# Altium PCB PCB.PcbDoc
Units mil, origin at the board's own origin, x right, y up, seen from the top; angles counter-clockwise.
Board outline 3929 x 1693 mil, 4 copper layers (Top Layer, Layer 1, Layer 2, Bottom Layer), stack 23.756 mil thick; 143 components, 82 nets, 428 pads, 1 vias.
Unrouted connection lines stored in the file: 274.
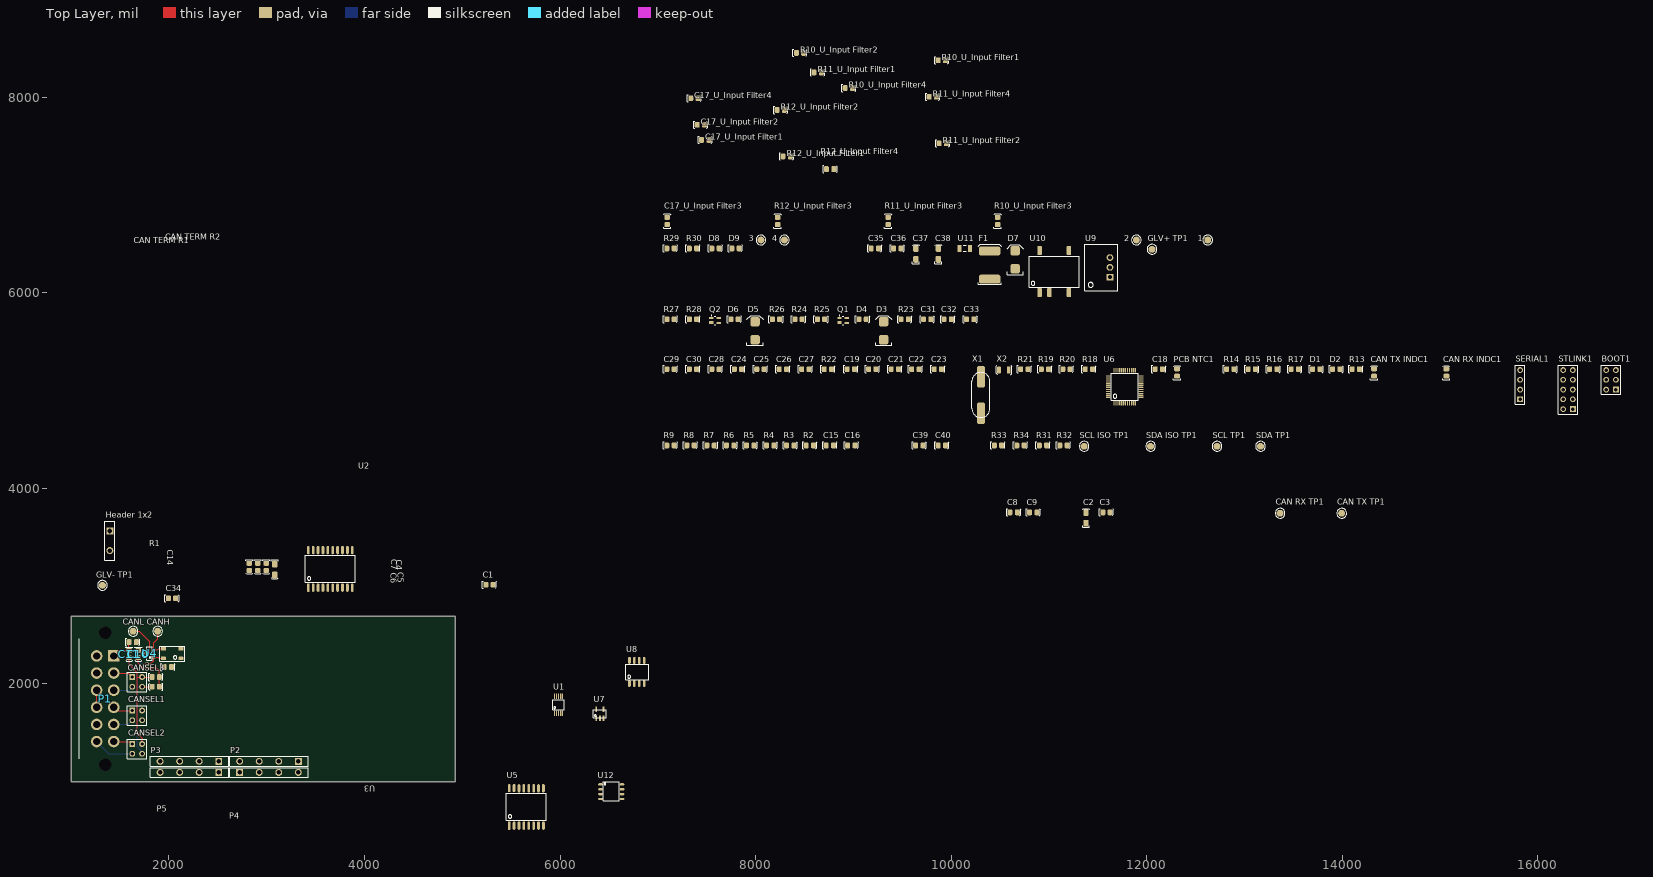
[diagram p0: Top Layer view]
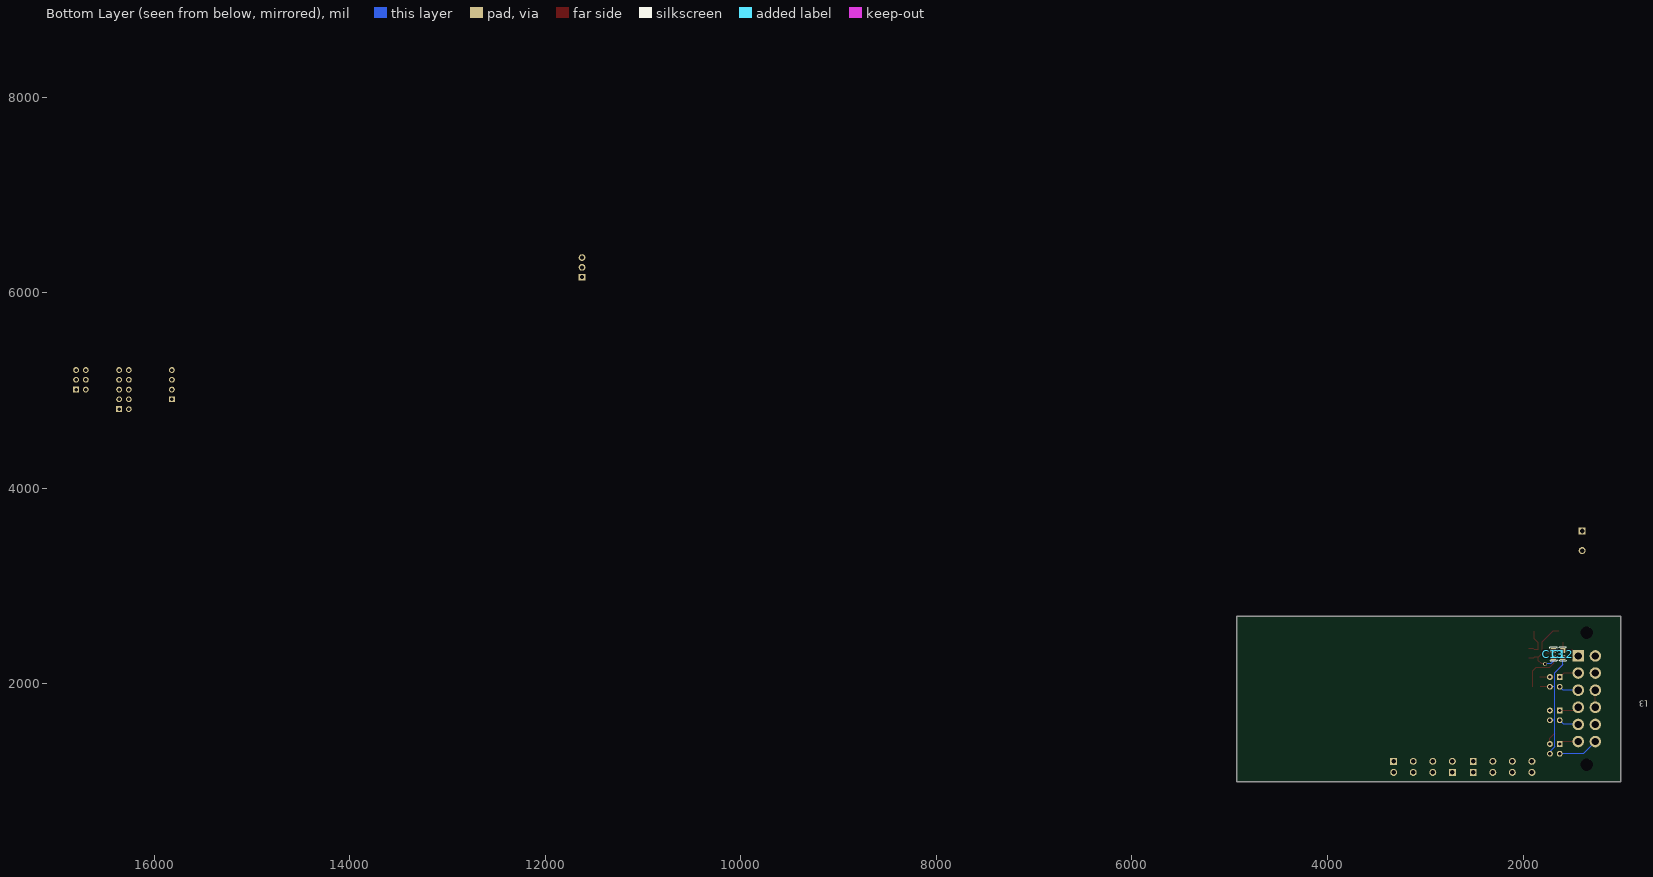
[diagram p1: Bottom Layer view, seen from below]
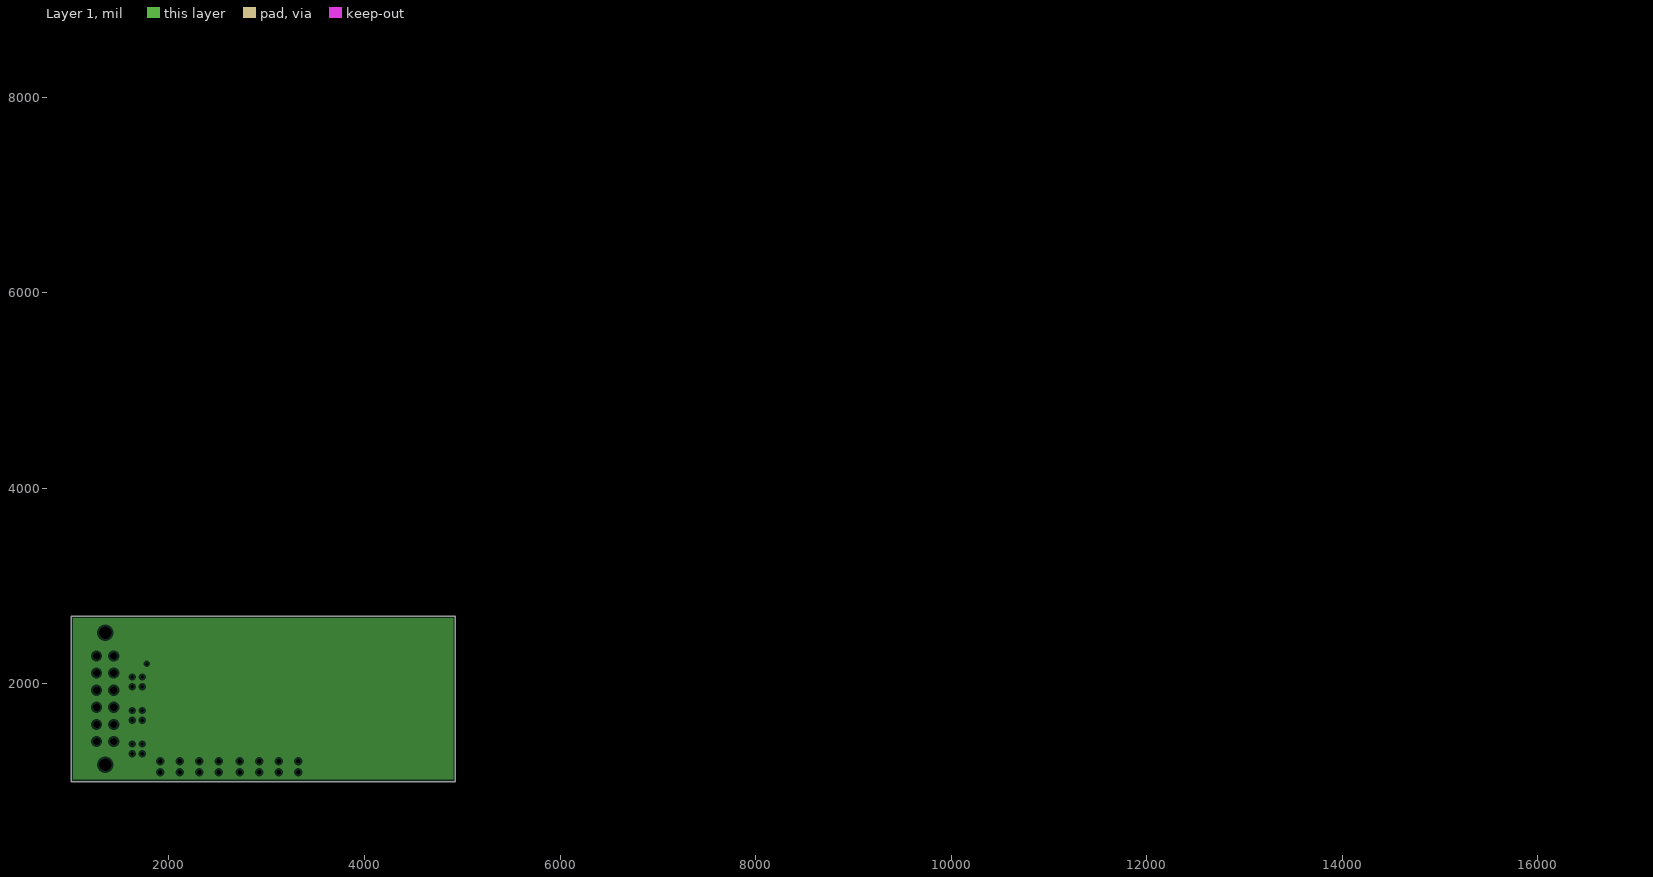
[diagram p2: Layer 1, clearances drawn from the general rule]
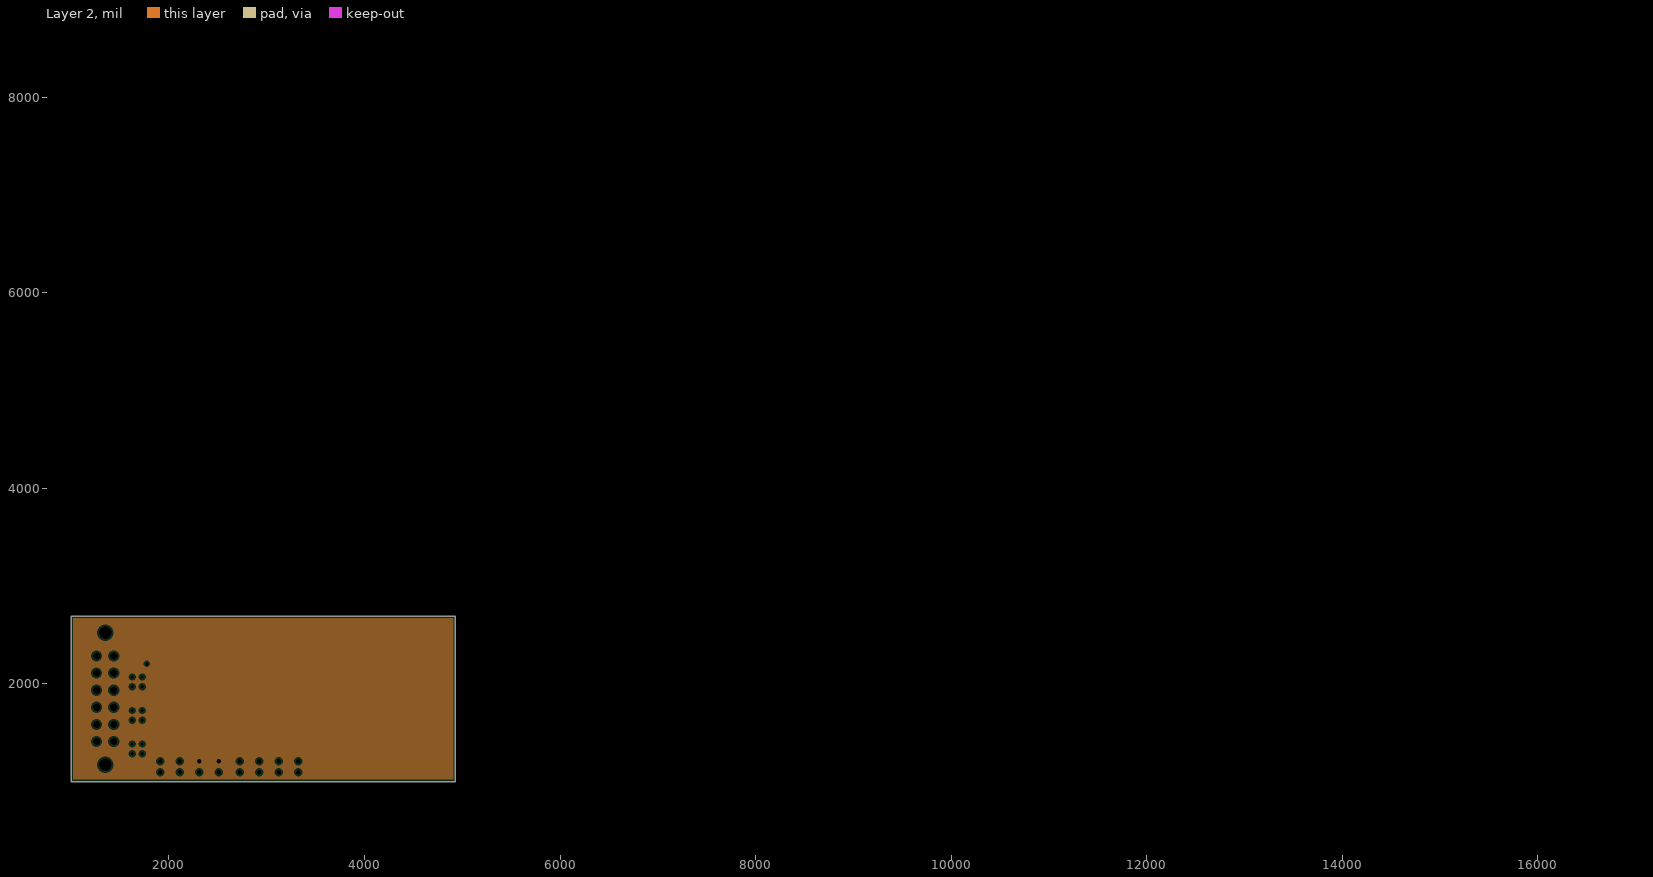
[diagram p3: Layer 2, clearances drawn from the general rule]

## Layer stack, top to bottom
Top Solder: solder mask 0.4, Solder Resist, Dk 3.5
Top Layer: signal copper 1.4
Dielectric 2: prepreg 2.8, PP-006, Dk 4.1
Layer 1: plane copper 1.3779, net 0V
Dielectric 1: dielectric 12.6, FR-4, Dk 4.8
Layer 2: plane copper 1.3779, net 5V
Dielectric 3: prepreg 2.8, PP-006, Dk 4.1
Bottom Layer: signal copper 1.4
Bottom Solder: solder mask 0.4, Solder Resist, Dk 3.5

## Board outline
1000,1000 4929,1000 4929,2693 1000,2693

## Design rules (kind name [scope] priority, off if disabled: settings)
Clearance [All] p1: gap=10 ignorepadtopadclearanceinfootprint=FALSE except(0: Arc-Hole Track-Hole SMDPad-Hole THPad-Hole Via-Hole Fill-Hole Poly-Hole Region-Hole Text-Hole)
PlaneClearance [All] p1: clearance=20
PlaneConnect [All] p1: planeconnectstyle=Relief reliefexpansion=20 reliefentries=4 reliefconductorwidth=10 reliefairgap=10
PolygonConnect [All] p1: connectstyle=Relief reliefconductorwidth=10 reliefentries=4 polygonreliefangle="90 Angle" airgapwidth=10
RoutingVias [All] p1: holewidth=28 width=50 viastyle="Through Hole" minholewidth=28 minwidth=50 maxholewidth=28 maxwidth=50
SolderMaskExpansion [All] p1: expansion=4 istentingtop=FALSE
Width [All] p1: maxlimit=10 minlimit=10 preferedwidth=10
28 further rules are at their usual default settings.

## Classes and differential pairs
channel class "Input Filter": "U_Input Filter1" "U_Input Filter2" "U_Input Filter3" "U_Input Filter4"
component class "U_Power Supply": 1 2 3 4 C34 C35 C36 C37 C38 D7 D8 D9 F1 "GLV+ TP1" "GLV- TP1" R29 R30 U9 U10 U11
component class "U_Output Driver": C31 C32 C33 D3 D4 D5 D6 Q1 Q2 R23 R24 R25 R26 R27 R28 U8
component class U_Microcontroller: BOOT1 C18 C19 C20 C21 C22 C23 C24 C25 C26 C27 C28 C29 C30 "CAN RX INDC1" "CAN TX INDC1" D1 D2 "PCB NTC1" R13 R14 R15 R16 R17 R18 R19 R20 R21 R22 SERIAL1 STLINK1 U6 U7 X1 X2
component class "U_Input Filter4": "C17_U_Input Filter4" "R10_U_Input Filter4" "R11_U_Input Filter4" "R12_U_Input Filter4"
component class "U_Input Filter3": "C17_U_Input Filter3" "R10_U_Input Filter3" "R11_U_Input Filter3" "R12_U_Input Filter3"
component class "U_Input Filter2": "C17_U_Input Filter2" "R10_U_Input Filter2" "R11_U_Input Filter2" "R12_U_Input Filter2"
component class "U_Input Filter1": "C17_U_Input Filter1" "R10_U_Input Filter1" "R11_U_Input Filter1" "R12_U_Input Filter1"
component class "U_Digital Inputs": C15 C16 C39 C40 R2 R3 R4 R5 R6 R7 R8 R9 R31 R32 R33 R34 "SCL ISO TP1" "SCL TP1" "SDA ISO TP1" "SDA TP1" U5 U12
component class U_CAN: C2 C3 C4 C5 C6 C7 C8 C9 C10 C11 C12 C13 C14 "CAN RX TP1" "CAN TERM R1" "CAN TERM R2" "CAN TX TP1" CANH CANL R1 U2 U3 U4
component class "U_4 Channel ADC": C1 U1
component class "Top Level": CANSEL1 CANSEL2 CANSEL3 "Header 1x2" P1 P2 P3 P4 P5

## Components (designator, comment, footprint, x,y, rotation, side; value= is the part's Value field where it differs from the comment)
1 "0mm" "SMD Test Point" 12625,6540 r90 top
2 "0mm" "SMD Test Point" 11895,6540 r90 top
3 "0mm" "SMD Test Point" 8055,6540 r90 top
4 "0mm" "SMD Test Point" 8295,6540 r90 top
BOOT1 "2.54mm" "TH 2.54mm Header 2x3" 16800,5010 r90 top
C1 "100nF" 0805 5279.07,3015.03 r0 top
C2 "10nF" 1206 11380,3745 r90 top
C3 "100nF" 0805 11590,3755 r0 top
C4 "100nF" 0805 2822.03,3195.72 r270 top
C5 "10nF" 1206 3081.03,3122.89 r270 top
C6 "10uF" 0805 2909.03,3195.72 r270 top
C7 "100nF" 0805 2996.03,3195.72 r270 top
C8 "10uF" 0805 10640,3755 r0 top
C9 "100nF" 0805 10840,3755 r0 top
C10 "22pF" 0805 1688,2304 r270 top
C11 "100pF" 0805 1593,2304 r270 top
C12 "100pF" 0805 1592.17,2304 r270 bottom
C13 "100pF" 0805 1688,2303 r270 bottom
C14 "100pF" 0805 1629,2428 r0 top
C15 "100nF" 0805 8760,4440 r0 top
C16 "100nF" 0805 8980,4440 r0 top
"C17_U_Input Filter1" "100nF" 0805 7485,7565 r0 top (schematic designator C17)
"C17_U_Input Filter2" "100nF" 0805 7440,7720 r0 top (schematic designator C17)
"C17_U_Input Filter3" "100nF" 0805 7095,6735 r90 top (schematic designator C17)
"C17_U_Input Filter4" "100nF" 0805 7375,7990 r0 top (schematic designator C17)
C18 "100nF" 0805 12125,5220 r0 top
C19 "22pF" 0805 8975,5220 r0 top
C20 "22pF" 0805 9195,5220 r0 top
C21 "1uF" 0805 9425,5220 r0 top
C22 "100nF" 0805 9635,5220 r0 top
C23 "1uF" 0805 9865,5220 r0 top
C24 "1uF" 0805 7820,5220 r0 top
C25 "100nF" 0805 8050,5220 r0 top
C26 "100nF" 0805 8280,5220 r0 top
C27 "100nF" 0805 8510,5220 r0 top
C28 "22uF" 0805 7590,5220 r0 top
C29 "22pF" 0805 7130,5220 r0 top
C30 "22pF" 0805 7360,5220 r0 top
C31 "100nF" 0805 9755,5730 r0 top
C32 "100nF" 0805 9965,5730 r0 top
C33 "10uF" 0805 10195,5730 r0 top
C34 "10uF" 0805 2032.07,2877.03 r0 top
C35 "10uF" 0805 9220,6455 r0 top
C36 "10uF" 0805 9450,6455 r0 top
C37 "22uF" 1206 9640,6445 r90 top
C38 "22uF" 1206 9870,6445 r90 top
C39 "100nF" 0805 9675,4440 r0 top
C40 "100nF" 0805 9905,4440 r0 top
"CAN RX INDC1" "Blue" "0805 LED" 15065,5185 r90 top
"CAN RX TP1" "0mm" "SMD Test Point" 13365,3745 r90 top
"CAN TERM R1" "56R" 0805 1864.03,1970.07 r180 top
"CAN TERM R2" "56R" 0805 1864.83,2071 r0 top
"CAN TX INDC1" "Blue" "0805 LED" 14325,5185 r90 top
"CAN TX TP1" "0mm" "SMD Test Point" 13995,3745 r90 top
CANH "0mm" "SMD Test Point" 1884,2538 r90 top (schematic designator "CANH TP1")
CANL "0mm" "SMD Test Point" 1633,2538 r90 top (schematic designator "CANL TP1")
CANSEL1 "2.54mm" "TH 2.54mm Header 2x2" 1625,1727.5 r270 top
CANSEL2 "2.54mm" "TH 2.54mm Header 2x2" 1625,1385 r270 top
CANSEL3 "2.54mm" "TH 2.54mm Header 2x2" 1625,2070 r270 top
D1 "Red" "0805 LED" 13735,5220 r0 top
D2 "Red" "0805 LED" 13940,5220 r0 top
D3 "SD560BTR" "SMB Diode" 9310,5530 r90 top
D4 "Orange" "0805 LED" 9095,5730 r0 top
D5 "SD560BTR" "SMB Diode" 7995,5530 r90 top
D6 "Orange" "0805 LED" 7785,5730 r0 top
D7 "SD560BTR" "SMB Diode" 10655,6255 r90 top
D8 "Red" "0805 LED" 7590,6455 r0 top
D9 "Red" "0805 LED" 7795,6455 r0 top
F1 "0ZCF0100AF2A" 2920 10395,6140 r90 top
"GLV+ TP1" "0mm" "SMD Test Point" 12055,6445 r90 top
"GLV- TP1" "0mm" "SMD Test Point" 1319.5,3008 r90 top
"Header 1x2" "2.54mm" "TH 5.08mm Header 1x2" 1395,3563 r270 top
P1 "DTF13-12P" DTF13-12P 1260,1848.23 r270 top
P2 "2.54mm" "TH 5.08mm Header 1x4" 3323,1208 r180 top
P3 "2.54mm" "TH 5.08mm Header 1x4" 2509,1208 r180 top
P4 "2.54mm" "TH 5.08mm Header 1x4" 2723,1094 r0 top
P5 "2.54mm" "TH 5.08mm Header 1x4" 2509,1094 r180 top
"PCB NTC1" "10K (NTC) (B25/85 3430K)" 0805 12310,5185 r90 top
Q1 "STD70N10F4" SOT-343_N 8895,5715 r0 top
Q2 "STD70N10F4" SOT-343_N 7585,5715 r0 top
R1 "0R" 0805 1989,2173 r0 top
R2 "10k" 0805 8555,4440 r0 top
R3 "10k" 0805 8355,4440 r0 top
R4 "10k" 0805 8150,4440 r0 top
R5 "10k" 0805 7945,4440 r0 top
R6 "10k" 0805 7740,4440 r0 top
R7 "10k" 0805 7540,4440 r0 top
R8 "10k" 0805 7335,4440 r0 top
R9 "10k" 0805 7130,4440 r0 top
"R10_U_Input Filter1" "10k" 0805 9905,8380 r0 top (schematic designator R10)
"R10_U_Input Filter2" "10k" 0805 8455,8455 r0 top (schematic designator R10)
"R10_U_Input Filter3" "10k" 0805 10475,6735 r90 top (schematic designator R10)
"R10_U_Input Filter4" "10k" 0805 8955,8095 r0 top (schematic designator R10)
"R11_U_Input Filter1" "1k" 0805 8635,8255 r0 top (schematic designator R11)
"R11_U_Input Filter2" "1k" 0805 9915,7530 r0 top (schematic designator R11)
"R11_U_Input Filter3" "1k" 0805 9355,6735 r90 top (schematic designator R11)
"R11_U_Input Filter4" "1k" 0805 9812.87,8006.03 r0 top (schematic designator R11)
"R12_U_Input Filter1" "10k" 0805 8317.87,7396.03 r0 top (schematic designator R12)
"R12_U_Input Filter2" "10k" 0805 8257.87,7871.03 r0 top (schematic designator R12)
"R12_U_Input Filter3" "10k" 0805 8225,6735 r90 top (schematic designator R12)
"R12_U_Input Filter4" "10k" 0805 8762.87,7266.03 r0 top (schematic designator R12)
R13 "10k" 0805 14140,5220 r0 top
R14 "510R" 0805 12855,5220 r0 top
R15 "510R" 0805 13075,5220 r0 top
R16 "680R" 0805 13295,5220 r0 top
R17 "680R" 0805 13515,5220 r0 top
R18 "10k" 0805 11410,5220 r0 top
R19 "5.1k" 0805 10960,5220 r0 top
R20 "5.1k" 0805 11180,5220 r0 top
R21 "10k" 0805 10750,5220 r0 top
R22 "10M" 0805 8740,5220 r0 top
R23 "1.5k" 0805 9525,5730 r0 top
R24 "10k" 0805 8440,5730 r0 top
R25 "20k" 0805 8670,5730 r0 top
R26 "1.5k" 0805 8210,5730 r0 top
R27 "10k" 0805 7130,5730 r0 top
R28 "20k" 0805 7360,5730 r0 top
R29 "680R" 0805 7130,6455 r0 top
R30 "510R" 0805 7360,6455 r0 top
R31 "3.3k" 0805 10940,4440 r0 top
R32 "3.3k" 0805 11150,4440 r0 top
R33 "3.3k" 0805 10480,4440 r0 top
R34 "3.3k" 0805 10710,4440 r0 top
"SCL ISO TP1" "0mm" "SMD Test Point" 11360,4430 r90 top
"SCL TP1" "0mm" "SMD Test Point" 12720,4430 r90 top
"SDA ISO TP1" "0mm" "SMD Test Point" 12040,4430 r90 top
"SDA TP1" "0mm" "SMD Test Point" 13165,4430 r90 top
SERIAL1 "2.54mm" "TH 2.54mm Header 1x4" 15820,4910 r90 top
STLINK1 "2.54mm" "TH 2.54mm Header 2x5" 16360,4810 r90 top
U1 "ADS1115" "TI 10-VSSOP" 5984,1786 r90 top
U2 "ADM3053" "AD SOIC-W 20" 3650,3176 r0 top
U3 "B82787C0104H002" "TDK 4-PC Pad" 2122,2260.57 r180 top
U4 "NUP2105L" "ON SOT-23" 1804,2311 r90 top
U5 "ADuM1400" "AD 16-SOIC" 5705,742 r0 top
U6 "STM32F103C8T6" "STM 48-LQFP" 11775,5040 r0 top
U7 "RT9193-33GB" "RICHTEK SOT-23-5" 6410,1687 r0 top
U8 "ADUM3221ARZ" "AD 8-SOIC" 6785,2122 r0 top
U9 "R-78C5.0-1.0" "RECOM 3-SIP" 11625,6160 r90 top
U10 "R2S-0505/HP" "RECOM 8-SMD (5 Pin)" 11055,6215 r0 top
U11 "744272121" INDC3216 10140,6455 r0 top
U12 "ISO1540DR" "TI 8-SOIC" 6795,872 r0 top
X1 "Value" "Abracon HC-49/US" 10305,4955 r90 top
X2 "32.768kHz" "EPSON 2-SMD" 10540,5210 r0 top

## Footprints (in the part's own frame and the unit in brackets; to place one, negate y for a bottom-side part, rotate by r counter-clockwise, add the part's x,y. Pads: shape width x height; smd on the part's side, far side on the other; paste and mask are expansions set on the pad)
0805 [mil]
  rrect50% 51.18x59.06 smd: 1(-37.87,-1.03) 2(36.93,-1.03)
  silkscreen extent -73,-37 71,37, body extent -39,-26 39,26, height 29
"0805 LED" [mil]
  rrect50% 51.18x59.06 smd: A(-37.87,-1.03) K(36.93,-1.03)
  silkscreen extent -73,-37 71,37, body extent -43,-25 35,25, height 39
1206 [mm]
  rrect50% 1.8x1.4 smd: 1(-2.6,0) 2(0.2,0)
  silkscreen extent -3.7,-0.9 1.2,0.9, body extent -2.9,-0.9 0.5,0.9, height 1.85
2920 [mm]
  rrect50% 2.3x5.6 smd: 1(0,0) 2(7.3,0)
  silkscreen extent -1.4,-3 9,3, body extent -0.34,-2.81 7.64,2.81, height 1.14
"Abracon HC-49/US" [mm]
  rrect50% 5.6x2.1 smd: 1(-4.75,0) 2(4.75,0)
  silkscreen extent -5.85,-2.35 5.85,2.35, body extent -6.35,-2.35 6.35,2.35, height 4.06
"AD 8-SOIC" [mm]
  oval 0.7x1.8 smd: 1(-1.905,-3) 2(-0.635,-3) 3(0.635,-3) 4(1.905,-3) 5(1.905,3) 6(0.635,3) 7(-0.635,3) 8(-1.905,3)
  silkscreen extent -2.87,-2 3.05,2, body extent -2.5,-3.1 2.5,3.1, height 1.76
"AD 16-SOIC" [mil]
  rrect50% 28x85 smd: 1(-225,-192.02)
  oval 28x85 smd: 2(-175,-192.02) 3(-125,-192.02) 4(-75,-192.02) 5(-25,-192.02) 6(25,-192.02) 7(75,-192.02) 8(125,-192.02) 9(125,190) 10(75,189.96) 11(25,189.96) 12(-25,189.96) 13(-75,189.96) 14(-125,189.96) 15(-175,191.98) 16(-225,191.98)
  silkscreen extent -257,-138 155,138, body extent -256,-209 156,209, height 104
"AD SOIC-W 20" [mil]
  rrect50% 28x85 smd: 1(-225,-192.02)
  oval 28x85 smd: 2(-175,-192.02) 3(-125,-192.02) 4(-75,-192.02) 5(-25,-192.02) 6(25,-192.02) 7(75,-192.02) 8(125,-192.02) 9(175,-192.02) 10(225,-192.02) 11(225,192.02) 12(175,191.98) 13(125,191.98) 14(75,191.98) 15(25,191.98) 16(-25,191.98) 17(-75,191.98) 18(-125,191.98) 19(-175,191.98) 20(-225,191.98)
  silkscreen extent -257,-138 256,138, body extent -260,-210 260,210, height 105
DTF13-12P [mm]
  round 3 hole 3.3 unplated: 0(-17.145,2.22) 0(17.145,2.22)
  rect 3x3 hole 1.9: 1(-11.114,4.45)
  round 3 hole 1.9: 2(-6.664,4.45) 3(-2.214,4.45) 4(2.236,4.45) 5(6.686,4.45) 6(11.136,4.45) 7(11.136,0) 8(6.686,0) 9(2.236,0) 10(-2.214,0) 11(-6.664,0) 12(-11.114,0)
  silkscreen extent -15.56,-4.45 15.59,-4.45, body extent -20.79,-27.74 20.79,6.55, height 26.13
"EPSON 2-SMD" [mm]
  rrect50% 1x1.8 smd: 1(-1.25,0) 2(1.25,0)
  silkscreen extent -2,-1.2 2,1.2, body extent -1.5,-1 1.5,1, height 1
INDC3216 [mm] "Chip Inductor, Body 3.2x1.6mm, IPC High Density"
  rect 1.1x1.8 smd: 1(-1.35,0) 2(1.35,0)
  silkscreen extent -0.4,-0.8 0.4,0.8, body extent -1.7,-0.9 1.7,0.9, height 0.55
"ON SOT-23" [mm] "NUP2105L"
  rrect50% 0.8x0.9 smd: 1(-0.95,-1) 2(0.95,-1) 3(0,1)
  silkscreen extent -1.75,-0.65 1.75,0.75, body extent -1.5,-1.27 1.5,1.28, height 1
"RECOM 3-SIP" [mm] "12 to 42 Vdc In, 9 Vdc Out"
  rect 1.75x1.75 hole 1: 1(0,0)
  round 1.75 hole 1: 2(2.54,0) 3(5.08,0)
  silkscreen extent -3.5,-2 8.5,6.5, body extent -3.26,-2.02 8.34,6.48, height 11.41
"RECOM 8-SMD (5 Pin)" [mm]
  rrect50% 1.2x2.4 smd: 1(-3.81,-5.4) 2(-1.27,-5.4) 4(3.81,-5.4) 5(3.81,5.5) 8(-3.81,5.5)
  silkscreen extent -6.5,-4 6.5,4, body extent -6.37,-5.55 6.38,5.55, height 9.2
"RICHTEK SOT-23-5" [mil]
  rrect50% 19x58 smd: 1(-39.37,-39.37) 2(-1.97,-39.37) 3(35.43,-39.37) 4(35.43,53.63) 5(-39.37,53.63)
  silkscreen extent -69,-31 64,46, body extent -62,-51 58,67, height 57
"SMB Diode" [mm]
  rrect50% 2.5x2.5 smd: A(-0.25,0) K(4.45,0)
  silkscreen extent -1.75,-2.1 6,2.1, body extent -0.69,-1.97 4.9,1.97, height 2.5
"SMD Test Point" [mm]
  round 1.8 smd: 1(0,0)
  silkscreen extent -1.27,-1.27 1.27,1.27
SOT-343_N [mm] "SOT343, 4-Leads, Body 2x1.3 mm, Pitch 1.3mm, Lead Span 2.1mm, IPC Medium Density"
  rect 1.15x0.5 smd: 1(-0.925,0.65) 3(0.925,-0.65) 4(0.925,0.65)
  rect 1.15x0.8 smd: 2(-0.925,-0.5)
  silkscreen extent -0.97,-1.1 0.2,1.35, body extent -0.7,-1.1 0.7,1.1, height 1
"STM 48-LQFP" [mm]
  rrect50% 0.3x1.2 smd: 1(-2.75,-4.25) 2(-2.25,-4.25) 3(-1.75,-4.25) 4(-1.25,-4.25) 5(-0.75,-4.25) 6(-0.25,-4.25) 7(0.25,-4.25) 8(0.75,-4.25) 9(1.25,-4.25) 10(1.75,-4.25) 11(2.25,-4.25) 12(2.75,-4.25) 25(2.75,4.25) 26(2.25,4.25) 27(1.75,4.25) 28(1.25,4.25) 29(0.75,4.25) 30(0.25,4.25) 31(-0.25,4.25) 32(-0.75,4.25) 33(-1.25,4.25) 34(-1.75,4.25) 35(-2.25,4.25) 36(-2.75,4.25)
  rrect50% 1.2x0.3 smd: 13(4.25,-2.75) 14(4.25,-2.25) 15(4.25,-1.75) 16(4.25,-1.25) 17(4.25,-0.75) 18(4.25,-0.25) 19(4.25,0.25) 20(4.25,0.75) 21(4.25,1.25) 22(4.25,1.75) 23(4.25,2.25) 24(4.25,2.75) 37(-4.25,2.75) 38(-4.25,2.25) 39(-4.25,1.75) 40(-4.25,1.25) 41(-4.25,0.75) 42(-4.25,0.25) 43(-4.25,-0.25) 44(-4.25,-0.75) 45(-4.25,-1.25) 46(-4.25,-1.75) 47(-4.25,-2.25) 48(-4.25,-2.75)
  silkscreen extent -3.5,-3.5 3.5,3.5, body extent -4.6,-4.6 4.6,4.6, height 1.6
"TDK 4-PC Pad" [mm]
  rrect50% 1.35x0.9 smd: 1(0,0) 2(0,-2.5) 3(4.55,-2.5) 4(4.55,0)
  silkscreen extent -1,-3.2 5.5,0.7, body extent -0.02,-2.82 4.48,0.38, height 2.8
"TH 2.54mm Header 1x4" [mm]
  rect 1.5x1.5 hole 0.9: 1(0,0)
  round 1.5 hole 0.9: 2(2.54,0) 3(5.08,0) 4(7.62,0)
  silkscreen extent -1.27,-1.27 8.89,1.27
"TH 2.54mm Header 2x2" [mm]
  rect 1.5x1.5 hole 0.9: 1(0,0)
  round 1.5 hole 0.9: 2(0,2.54) 3(2.54,0) 4(2.54,2.54)
  silkscreen extent -1.27,-1.27 3.81,3.81
"TH 2.54mm Header 2x3" [mm]
  rect 1.5x1.5 hole 0.9: 1(0,0)
  round 1.5 hole 0.9: 2(0,2.54) 3(2.54,0) 4(2.54,2.54) 5(5.08,0) 6(5.08,2.54)
  silkscreen extent -1.27,-1.27 6.35,3.81
"TH 2.54mm Header 2x5" [mm]
  rect 1.5x1.5 hole 0.9: 1(0,0)
  round 1.5 hole 0.9: 2(0,2.54) 3(2.54,0) 4(2.54,2.54) 5(5.08,0) 6(5.08,2.54) 7(7.62,0) 8(7.62,2.54) 9(10.16,0) 10(10.16,2.54)
  silkscreen extent -1.27,-1.27 11.43,3.81
"TH 5.08mm Header 1x2" [mm]
  rect 1.8x1.8 hole 1.2: 1(0,0)
  round 1.8 hole 1.2: 2(5.08,0)
  silkscreen extent -2.54,-1.27 7.62,1.27
"TH 5.08mm Header 1x4" [mm]
  rect 1.8x1.8 hole 1.2: 1(0,0)
  round 1.5 hole 0.9: 2(5.08,0)
  round 1.8 hole 1.2: 2(5.08,0) 3(10.16,0) 4(15.24,0)
  silkscreen extent -2.54,-1.27 17.78,1.27
"TI 8-SOIC" [mm]
  oval 1.2x0.6 smd: 1(-9.677,2.54) 2(-9.677,1.27) 3(-9.677,0) 4(-9.677,-1.27) 5(-4.089,-1.27) 6(-4.089,0) 7(-4.089,1.27) 8(-4.089,2.54)
  silkscreen extent -9,-1.78 -4.75,3.17, body extent -9.96,-1.87 -3.76,3.14, height 1.76
"TI 10-VSSOP" [mm]
  rrect50% 1.45x0.3 smd: 1(-2.2,1) 2(-2.2,0.5) 3(-2.2,0) 4(-2.2,-0.5) 5(-2.2,-1) 6(2.2,-1) 7(2.2,-0.5) 8(2.2,0) 9(2.2,0.5) 10(2.2,1)
  silkscreen extent -1.25,-1.5 1.25,1.5, body extent -2.45,-1.5 2.45,1.5, height 1.12

## Part data
1 2 3 4 "CAN RX TP1" "CAN TX TP1" CANH CANL "GLV+ TP1" "GLV- TP1" "SCL ISO TP1" "SCL TP1" "SDA ISO TP1" "SDA TP1": library part "SMD Test Point", Angle=0, Contact=NA, Flange=No, Part Number="SMD Test Point", Pitch=0mm, Positions=1, Row Spacing=0
BOOT1: library part "TH 2.54mm Header 2x3", Angle=0, Contact=NA, Flange=No, Part Number="TH 2.54mm Header 2x3", Pitch=2.54mm, Positions=6, Row Spacing=2.54mm
C1 C3 C4 C7 C9 C15 C16 "C17_U_Input Filter1" "C17_U_Input Filter2" "C17_U_Input Filter3" "C17_U_Input Filter4" C18 C22 C25 C26 C27 C31 C32 C39 C40: library part GCM21BR71E104KA37L, Manufacturer=muRata, Rated Voltage=25V, Tolerance=10%, Material=X7R, Part Number=GCM21BR71E104KA37L
C2 C5: library part GCM3195C2A103JA16D, Digikey Part Number=490-4978-2-ND, Manufacturer=muRata, Rated Voltage=100V, Tolerance=5%, Material=Ceramic, Part Number=GCM3195C2A103JA16D
C6 C8 C33 C34 C35 C36: library part GRM21BR6YA106KE43L, Digikey Part Number=490-10514-6-ND, Manufacturer=muRata, Rated Voltage=50V, Tolerance=10%, Material=X5R, Part Number=GRM21BR6YA106KE43L
C10 C19 C20 C29 C30: library part GCM21B5C1H220JA37L, Manufacturer=muRata, Rated Voltage=50V, Tolerance=5%, Material=C0G, Part Number=GCM21B5C1H220JA37L
C11 C12 C13 C14: library part GCM21B5C1H101JA37L, Manufacturer=muRata, Rated Voltage=50V, Tolerance=5%, Material=C0G, Part Number=GCM21B5C1H101JA37L
C21 C23 C24: library part AC0805KKX7R8BB105, Manufacturer=YAGEO, Rated Voltage=25V, Tolerance=10%, Material=X7R, Part Number=AC0805KKX7R8BB105
C28: library part GRM21BR61A226ME51L, Digikey Part Number=490-10511-1-ND, Manufacturer=muRata, Rated Voltage=10V, Tolerance=20%, Material=X5R, Part Number=GRM21BR61A226ME51L
C37 C38: library part CC1206MKX5R7BB226, Digikey Part Number=311-1997-2-ND, Manufacturer=YAGEO, Rated Voltage=16V, Tolerance=20%, Material=Ceramic, Part Number=CC1206MKX5R7BB226
"CAN RX INDC1" "CAN TX INDC1": library part SML-MN2BCTT86C, "LED BLUE CLEAR 2012 SMD", Digikey Part Number=846-1207-1-ND, Manufacturer="ROHM Semiconductor", Colour=Blue, Digikey Link=https://www.digikey.com/product-detail/en/rohm-semiconductor/SMLMN2BCTT86C/846-1207-1-ND/6057239, Part Number=SML-MN2BCTT86C
"CAN TERM R1" "CAN TERM R2": library part RC0805FR0756RL, Manufacturer=YAGEO, Rated Voltage=0.125W, Tolerance=0.01, Material=FR-07, Part Number=RC0805FR0756RL
CANSEL1 CANSEL2 CANSEL3: library part "TH 2.54mm Header 2x2", Angle=0, Contact=NA, Flange=No, Part Number="TH 2.54mm Header 2x2", Pitch=2.54mm, Positions=4, Row Spacing=2.54mm
D1 D2 D8 D9: library part SML-210LTT86, "Red LED Indication - Discrete 1.75V 0805 (2012 Metric)", Digikey Part Number=511-1286-1-ND, Manufacturer="ROHM Semiconductor", Colour=Red, Digikey Link=https://www.digikey.com/product-detail/en/rohm-semiconductor/SML-210LTT86/511-1286-1-ND/637099, Part Number=SML-210LTT86
D3 D5 D7: "1.2V_F 600V 5A SMB", Digikey Part Number=1655-1530-2-ND, Manufacturer="SMC Diode Solutions", Digikey Link=https://www.digikey.com/product-detail/en/smc-diode-solutions/SD560BTR/1655-1530-2-ND/6022620, Part Number=SD560BTR
D4 D6: library part SML-211DTT86, "Orange LED Indication - Discrete 1.75V 0805 (2012 Metric)", Digikey Part Number=511-1291-1-ND, Manufacturer="ROHM Semiconductor", Colour=Orange, Digikey Link=https://www.digikey.com/product-detail/en/rohm-semiconductor/SML-211DTT86/511-1291-1-ND/637104, Part Number=SML-211DTT86
F1: "PTC RESET FUSE 60V 1A 292", Digikey Part Number=507-2070-1-ND, Manufacturer="Littelfuse Inc.", Digikey Link=https://www.digikey.com/product-detail/en/bel-fuse-inc/0ZCF0100AF2A/507-2070-1-ND/6210547, Part Number=0ZCF0100AF2A
"Header 1x2": library part "TH 5.08mm Header 1x2", Angle=0, Contact=NA, Flange=No, Part Number="TH 5.08mm Header 1x2", Pitch=2.54mm, Positions=2, Row Spacing=5.08mm
P1: library part DTF13-12P[[/\]]DTF13-12P, Digikey Part Number=1734-1861-ND, Angle=90, Contact="Copper Alloy", Digikey Link=https://www.digikey.com.au/product-detail/en/te-connectivity-deutsch-connectors/DTF13-12PA/1734-1861-ND/9744662, Flange=No, Part Number=DTF13-12P, Pitch=4.45mm, Positions=12, Row Spacing=4.45mm
P2 P3 P4 P5: library part "TH 5.08mm Header 1x4", Angle=0, Contact=NA, Flange=No, Part Number="TH 5.08mm Header 1x4", Pitch=2.54mm, Positions=4, Row Spacing=5.08mm
"PCB NTC1": library part NTCS0805E3103FLT, Digikey Part Number=BC2733CT-ND, Manufacturer="Vishay Beyschlag", Rated Voltage=210mW, Tolerance=0.01, Part Number=NTCS0805E3103FLT
Q1 Q2: "N-Channel 100V 60A (Tc) 125W (Tc) Surface Mount DPAK", Digikey Part Number=497-8806-2-ND, Manufacturer=STMicroelectronics, Digikey Link=https://www.digikey.com/product-detail/en/stmicroelectronics/STD70N10F4/497-8806-2-ND/2035599, LatestRevisionDate=29-May-2009, LatestRevisionNote="IPC-7351 Footprint Added.", PackageDescription="4-Pin SOT-343 Package 1.3 mm Pitch, 2.1 mm Lead Span", PackageReference=SOT-343, PackageVersion=Sep-2000, Part Number=STD70N10F4, Published=24-Mar-1999, Publisher="Altium Limited"
R1: library part RC0805FR070RL, Manufacturer=YAGEO, Rated Voltage=0.125W, Tolerance=0.01, Material=FR-07, Part Number=RC0805FR070RL
R2 R3 R4 R5 R6 R7 R8 R9 "R10_U_Input Filter1" "R10_U_Input Filter2" "R10_U_Input Filter3" "R10_U_Input Filter4" "R12_U_Input Filter1" "R12_U_Input Filter2" "R12_U_Input Filter3" "R12_U_Input Filter4" R13 R18 R21 R24 R27: library part RC0805FR0710KL, Manufacturer=YAGEO, Rated Voltage=0.125W, Tolerance=0.01, Material=FR-07, Part Number=RC0805FR0710KL
"R11_U_Input Filter1" "R11_U_Input Filter2" "R11_U_Input Filter3" "R11_U_Input Filter4": library part RC0805FR071KL, Manufacturer=YAGEO, Rated Voltage=0.125W, Tolerance=0.01, Material=FR-07, Part Number=RC0805FR071KL
R14 R15 R30: library part RC0805FR07510RL, Manufacturer=YAGEO, Rated Voltage=0.125W, Tolerance=0.01, Material=FR-07, Part Number=RC0805FR07510RL
R16 R17 R29: library part RC0805FR07680RL, Manufacturer=YAGEO, Rated Voltage=0.125W, Tolerance=0.01, Material=FR-07, Part Number=RC0805FR07680RL
R19 R20: library part RC0805FR075K1L, Manufacturer=YAGEO, Rated Voltage=0.125W, Tolerance=0.01, Material=FR-07, Part Number=RC0805FR075K1L
R22: library part RC0805FR0710ML, Manufacturer=YAGEO, Rated Voltage=0.125W, Tolerance=0.01, Material=FR-07, Part Number=RC0805FR0710ML
R23 R26: library part RC0805FR071K5L, Manufacturer=YAGEO, Rated Voltage=0.125W, Tolerance=0.01, Material=FR-07, Part Number=RC0805FR071K5L
R25 R28: library part RC0805FR0720KL, Manufacturer=YAGEO, Rated Voltage=0.125W, Tolerance=0.01, Material=FR-07, Part Number=RC0805FR0720KL
R31 R32 R33 R34: library part RC0805FR073K3L, Manufacturer=YAGEO, Rated Voltage=0.125W, Tolerance=0.01, Material=FR-07, Part Number=RC0805FR073K3L
SERIAL1: library part "TH 2.54mm Header 1x4", Angle=0, Contact=NA, Flange=No, Part Number="TH 2.54mm Header 1x4", Pitch=2.54mm, Positions=4, Row Spacing=2.54mm
STLINK1: library part "TH 2.54mm Header 2x5", Angle=0, Contact=NA, Flange=No, Part Number="TH 2.54mm Header 2x5", Pitch=2.54mm, Positions=10, Row Spacing=2.54mm
U1: "16 Bit Analog to Digital Converter 2, 4 Input 1 Sigma-Delta 10-VSSOP", Digikey Part Number=296-38849-1-ND, Manufacturer="Texas Instruments", Digikey Link=https://www.digikey.com/product-detail/en/texas-instruments/ADS1115IDGSR/296-38849-1-ND/5142969, Part Number=ADS1115
U2: "Isolated CAN Transceiver", Digikey Part Number=ADM3053BRWZ-ND, Manufacturer="Analogue Devices", Digikey Link=https://www.digikey.com/product-detail/en/analog-devices-inc/ADM3053BRWZ/ADM3053BRWZ-ND/2709332, Part Number=ADM3053
U3: "100µH @ 100kHz 2 Line Common Mode Choke Surface Mount 5.8 kOhms @ 10MHz 150mA DCR 2Ohm", Digikey Part Number=495-4598-1-ND, Inductance="100µH @ 100kHz", Manufacturer="EPCOS (TDK)", Rated Current=150mA, Digikey Link=https://www.digikey.com/product-detail/en/epcos-tdk/B82787C0104H002/495-4598-2-ND/3680998, Impedence="5.8 kOhms @ 10MHz", Material=Wirewound, Part Number=B82787C0104H002
U4: "Dual Line CAN Bus Protector", Digikey Part Number=NUP2105LT1GOSCT-ND, Manufacturer="ON Semiconductor", Digikey Link=https://www.digikey.com/product-detail/en/on-semiconductor/NUP2105LT1G/NUP2105LT1GOSCT-ND/1485001, Part Number=NUP2105L
U5: "General Purpose Digital Isolator 2500Vrms 4 Channel 1Mbps 25kV/µs CMTI 16-SOIC (0.295\", 7.50mm Width)", Digikey Part Number=ADUM1400WSRWZ-ND, Manufacturer="Analog Devices", Digikey Link=https://www.digikey.com/product-detail/en/analog-devices-inc/ADUM1400WSRWZ/ADUM1400WSRWZ-ND/1873713, Part Number=ADuM1400
U6: "ARM® Cortex®-M3 STM32F1 Microcontroller IC 32-Bit 72MHz 64KB (64K x 8) FLASH", Digikey Part Number=497-6063-ND, Manufacturer=STMicroelectronics, Digikey Link=https://www.digikey.com/product-detail/en/stmicroelectronics/STM32F103C8T6/497-6063-ND/1646338, Part Number=STM32F103C8T6
U7: "IC REG LINEAR 3.3V 300MA SOT23-5", Digikey Part Number=1028-1014-1-ND, Manufacturer=Richtek, Digikey Link=https://www.digikey.com/products/en?keywords=1028-1014-1-ND, Part Number=RT9193-33GB
U8: "4A Gate Driver Magnetic Coupling 2500Vrms 2 Channel 8-SOIC", Digikey Part Number=ADUM3221ARZ-ND, Manufacturer="Analog Devices", Digikey Link=https://www.digikey.com/product-detail/en/analog-devices-inc/ADUM3221ARZ/ADUM3221ARZ-ND/2616333, Part Number=ADUM3221ARZ
U9: "CONV DC/DC 1A 5V OUT SIP VERT", Digikey Part Number=945-1395-5-ND, Manufacturer=Recom, Digikey Link=https://www.digikey.com.au/product-detail/en/recom-power/R-78C5.0-1.0/945-1395-5-ND/2652148, Isolation=Non-Isolated, Part Number=R-78C5.0-1.0
U10: "Isolated Module DC DC Converter 1 Output 3.3V 606mA 4.5V - 5.5V Input", Digikey Part Number=945-1764-5-ND, Input Voltage=4.5V-5.5V, Manufacturer=Recom, Output Power=2W, Output Voltage=5V, Digikey Link=https://www.digikey.com/product-detail/en/recom-power/R2S-0505-HP/945-1764-5-ND/2302761, Efficiency=0.85, Isolation=Isolated, Part Number=R2S-0505/HP
U11: "120µH @ 100kHz 2 Line Common Mode Choke Surface Mount 460 Ohms @ 30MHz 2.5A DCR 25mOhm", Digikey Part Number=732-1489-1-ND, Inductance="120uH @ 100kHz", Manufacturer="Wurth Electronics Inc", Rated Current=2.5A, Digikey Link=https://www.digikey.com/product-detail/en/w-rth-elektronik/744272121/732-1489-1-ND/1639501, Impedence="460 Ohms @ 30MHz", Material=Wirewound, Part Number=744272121
U12: "I2C Digital Isolator (Multichannel)", Digikey Part Number=296-34871-1-ND, Manufacturer="Texas Instruments", Digikey Link=https://www.digikey.com/product-detail/en/texas-instruments/ISO1540DR/296-34871-1-ND/3587214, Part Number=ISO1540DR
X1: library part ABLS-16.000MHZ-B4-T, Digikey Part Number=535-10226-1-ND, Load Capacitance=18pF, Manufacturer="Abracon LLC", Digikey Link=https://www.digikey.com/product-detail/en/abracon-llc/ABLS-16.000MHZ-B4-T/535-10226-1-ND/2184261, ESR=40R, Part Number=ABLS-16.000MHZ-B4-T
X2: library part "FC-135 32.7680KA-A5", Digikey Part Number=SER4103TR-ND, Load Capacitance=12.5pF, Manufacturer=EPSON, Digikey Link=https://www.digikey.com/product-detail/en/epson/FC-135-32.7680KA-A5/SER4103TR-ND/5259895, ESR=70k, Part Number="FC-135 32.7680KA-A5"

## Via types
v1: diameter 39.37, hole 28, Top Layer to Bottom Layer, 1 vias

## Nets (pads, with @x,y where several pads share a name; then routed paths per layer and width w, separated by ;. In a path a pad name is that pad's centre, name@x,y a point inside that pad or via, vN(x,y) a via of type N, cw(c..) or ccw(c..) an arc to the next point about the centre after c; other vN are vias at no path point)
0V: 3.1 "C17_U_Input Filter1.1" "C17_U_Input Filter2.1" "C17_U_Input Filter3.1" "C17_U_Input Filter4.1" "R12_U_Input Filter1.1" "R12_U_Input Filter2.1" "R12_U_Input Filter3.1" "R12_U_Input Filter4.1" C1.1 C15.1 C32.1 C33.1 C36.1 C37.1 C39.1 R3.1 R5.1 R7.1 R9.1 R29.1 U1.3 U5.2 U5.8 U8.5 U9.2 U10.1 U12.5
"0V (ISO)": 4.1 "PCB NTC1.1" BOOT1.5 BOOT1.6 C2.1 C3.1 C8.1 C9.1 C16.1 C18.1 C19.1 C20.1 C21.1 C22.1 C23.1 C24.1 C25.1 C26.1 C27.1 C28.1 C29.1 C30.1 C31.1 C38.1 C40.1 R14.1 R16.1 R17.1 R24.1 R27.1 R30.1 SERIAL1.4 STLINK1.1 U2.1 U2.3 U2.7 U2.9 U2.10 U5.9 U5.15 U6.8 U6.23 U6.35 U6.47 U7.2 U8.4 U10.4 U12.4
"3.3V (ISO)": BOOT1.1 BOOT1.2 C22.2 C23.2 C24.2 C25.2 C26.2 C27.2 C40.2 D1.A D2.A R33.2 R34.2 SERIAL1.1 STLINK1.7 STLINK1.8 U6.1 U6.9 U6.24 U6.36 U6.48 U7.5 U12.1
5kW: P1.8
5V: 1.1 "R10_U_Input Filter1.2" "R10_U_Input Filter2.2" "R10_U_Input Filter3.2" "R10_U_Input Filter4.2" C1.2 C15.2 C32.2 C33.2 C37.2 C39.2 D8.A P3.1 P3.2 R2.2 R4.2 R6.2 R8.2 R31.2 R32.2 U1.1 U1.8 U5.1 U8.8 U9.3 U10.2 U12.8
"5V (ISO)": 2.1 C2.2 C3.2 C8.2 C9.2 C16.2 C21.2 C31.2 C38.2 D9.A R13.2 R19.2 R20.2 U2.6 U2.8 U5.10 U5.16 U7.1 U7.3 U8.1 U10.5
12V/24V: C36.2 U9.1 U11.2
BOOT0: BOOT1.3 R21.1
BOOT1: BOOT1.4 R18.2
CAN1H: CANSEL1.3 P1.5 | length 207.4
  Bottom Layer w10: P1.5 1582.5,1585 CANSEL1.3
CAN1L: CANSEL1.1 P1.4 | length 203.3
  Top Layer w10: P1.4 1467.89,1727.5 CANSEL1.1
CAN2H: CANSEL2.3 P1.7 | length 416.7
  Bottom Layer w10: P1.7 1384.8,1285 CANSEL2.3
CAN2L: CANSEL2.1 P1.6 | length 200.1
  Top Layer w10: P1.6 1435.47,1409.53 1600.47,1409.53 CANSEL2.1
CAN3H: CANSEL3.3 P1.3 | length 204.1
  Bottom Layer w10: P1.3 1590.39,1935.39 CANSEL3.3
CAN3L: CANSEL3.1 P1.2 | length 206.6
  Top Layer w10: P1.2 1584.41,2110.59 CANSEL3.1
"CAN RX INDC": "CAN RX INDC1.A" U6.19
"CAN TX INDC": "CAN TX INDC1.A" U6.18
CANH: "CAN TERM R1.2" C12.2 CANSEL1.4 CANSEL2.4 CANSEL3.4 U3.2 | length 1234.3
  Top Layer w10: CANSEL3.4 1826,1970
  Bottom Layer w10: C12.2 1593.2,2196.8 1677,2113 1677,1970 ; CANSEL2.4 1725,1307 1677,1355 1677,1626 ; CANSEL1.4 1723.5,1626 1677,1626 ; CANSEL3.4 1677,1970 ; 1677,1626 1677,1970
CANL: "CAN TERM R2.1" C11.2 CANSEL1.2 CANSEL2.2 CANSEL3.2 U3.1 | length 1089
  Top Layer w10: C11.2 1591.97,2199.03 1676,2115 1676,2070 ; CANSEL2.2 1726,1386 1726,1445 1676,1495 1676,2070 ; 1826.93,2070 CANSEL3.2 1676,2070
CANS: C4.1 C5.1 C6.1 C7.1 C10.1 C11.1 C12.1 C13.1 C14.1 P1.1 R1.1 U2.11 U2.13 U2.16 U2.20 U4.3 | length 547.5
  Top Layer w10: P1.1 1491.28,2341.87 C11.1 ; C14.1 1590.66,2426.5 1591.13,2426.03 1591.13,2342.71 C11.1 ; U4.3 1739,2311 1708.13,2341.87 C10.1 C11.1
  Bottom Layer w10: C12.1 1593.7,2341.37 1688.53,2341.37 C13.1
"Digital 1": P5.1 R2.1 R3.2 U5.3
"Digital 2": P5.2 R4.1 R5.2 U5.4
"Digital 3": P5.3 R6.1 R7.2 U5.5
"Digital 4": P5.4 R8.1 R9.2 U5.6
"Driver 1": D3.A D4.K P2.2
"Driver 2": D5.A D6.K P2.4
GLV+: D3.K D5.K R23.2 R26.2
GLV-: "GLV- TP1.1" "Header 1x2.2" C34.1 C35.1 P1.11
"Green In": P1.9 P1.10 | length 175.2
  Top Layer w10: P1.9 P1.10
NetC4_2: C4.2 C5.2 C6.2 C7.2 U2.12 U2.19
NetC10_2: "CAN TERM R1.1" "CAN TERM R2.2" C10.2 | length 466.4
  Top Layer w10: C10.2 1686.97,2210.03 1731,2166 1869,2166 1903,2132 1903,2069.97 ; 1901.76,2069.97 1901.9,2069.83 1901.9,1971.1
NetC13_2: C13.2 CANL.1 U2.15 U3.4 U4.1 | length 744.6
  Top Layer w10: CANL.1 1697,2538 1803,2432 1803,2313.97 1832.43,2284.54 1832.43,2284.13 1842.96,2273.6 U4.1 ; v1(1774,2204) 1809.69,2204 1843.37,2237.68 U4.1 ; U3.4 1896.43,2260.57 1883.4,2273.6 U4.1
  Bottom Layer w10: C13.2 1689.03,2230.97 1716,2204 v1(1774,2204)
NetC14_2: C14.2 CANH.1 U2.17 U3.3 U4.2 | length 310.6
  Top Layer w10: CANH.1 1884,2461 1843,2420 1843,2348.77 U4.2 1882.4,2348.4 1893,2359 U3.3
"NetC17_U_Input Filter1_2": "C17_U_Input Filter1.2" "R10_U_Input Filter1.1" "R11_U_Input Filter1.2" "R12_U_Input Filter1.2" U1.7
"NetC17_U_Input Filter2_2": "C17_U_Input Filter2.2" "R10_U_Input Filter2.1" "R11_U_Input Filter2.2" "R12_U_Input Filter2.2" U1.6
"NetC17_U_Input Filter3_2": "C17_U_Input Filter3.2" "R10_U_Input Filter3.1" "R11_U_Input Filter3.2" "R12_U_Input Filter3.2" U1.5
"NetC17_U_Input Filter4_2": "C17_U_Input Filter4.2" "R10_U_Input Filter4.1" "R11_U_Input Filter4.2" "R12_U_Input Filter4.2" U1.4
NetC28_2: C28.2 U7.4
NetC34_2: C34.2 C35.2 D7.K U11.1
"NetCAN RX INDC1_K": "CAN RX INDC1.K" R17.2
"NetCAN RX TP1_1": "CAN RX TP1.1" U2.4 U6.45
"NetCAN TX INDC1_K": "CAN TX INDC1.K" R16.2
"NetCAN TX TP1_1": "CAN TX TP1.1" U2.5 U6.46
NetD1_K: D1.K R14.2
NetD2_K: D2.K R15.2
NetD4_A: D4.A R23.1
NetD6_A: D6.A R26.1
NetD7_A: D7.A F1.2
NetD8_K: D8.K R29.2
NetD9_K: D9.K R30.2
NetQ1_G: R25.2 U8.7
NetQ2_G: R28.2 U8.6
NetR1_2: R1.2 U2.18
NetR18_1: R18.1 U6.20
NetR19_1: R19.1 R31.1 U6.42 U12.6
NetR20_1: "SDA TP1.1" R20.1 R32.1 U6.43 U12.7
NetR21_2: R21.2 U6.44
NetR24_2: R24.2 U6.27 U8.2
NetR27_2: R27.2 U6.28 U8.3
NetR33_1: "SCL ISO TP1.1" "SCL TP1.1" R33.1 U1.10 U12.3
NetR34_1: "SDA ISO TP1.1" R34.1 U1.9 U12.2
NetU5_11: U5.11 U6.26
NetU5_12: U5.12 U6.25
NetU5_13: U5.13 U6.22
NetU5_14: U5.14 U6.21
NRST: STLINK1.2 U6.7
PC13: R15.1 U6.2
"PCB TEMP": "PCB NTC1.2" C18.2 R13.1 U6.10
"Sensor 1": "R11_U_Input Filter4.1" P4.1
"Sensor 2": "R11_U_Input Filter3.1" P4.2
"Sensor 3": "R11_U_Input Filter2.1" P4.3
"Sensor 4": "R11_U_Input Filter1.1" P4.4
SWCLK: STLINK1.3 U6.37
SWDIO: STLINK1.5 U6.34
"UART RX": SERIAL1.3 U6.31
"UART TX": SERIAL1.2 U6.30
USBDM: U6.32
USBDP: U6.33
XTALA: C29.2 R22.2 U6.5 X1.2
XTALB: C30.2 R22.1 U6.6 X1.1
XTALC: C19.2 U6.3 X2.1
XTALD: C20.2 U6.4 X2.2
pads on no net: "GLV+ TP1.1" "Header 1x2.1" F1.1 P1.0 P1.12 P2.1 P2.3 P3.3 P3.4 Q1.1 Q1.2 Q1.3 Q1.4 Q2.1 Q2.2 Q2.3 Q2.4 R25.1 R28.1 STLINK1.4 STLINK1.6 STLINK1.9 STLINK1.10 U1.2 U2.2 U2.14 U5.7 U6.11 U6.12 U6.13 U6.14 U6.15 U6.16 U6.17 U6.29 U6.38 U6.39 U6.40 U6.41 U10.8

## Polygon pours and split planes (outlines as drawn)
0V on Layer 1 (split plane): 4908.9,1020.1 1020.1,1020.1 1020.1,2672.9 4908.9,2672.9
5V on Layer 2 (split plane): 4908.9,1020.1 1020.1,1020.1 1020.1,2672.9 4908.9,2672.9